# Altium PCB Board Sensor2.PcbDoc
Units mil, origin at the board's own origin, x right, y up, seen from the top; angles counter-clockwise.
Board outline 12874.02 x 9094.49 mil, 2 copper layers (Top Layer, Bottom Layer); 33 components, 0 nets, 158 pads, 0 vias.
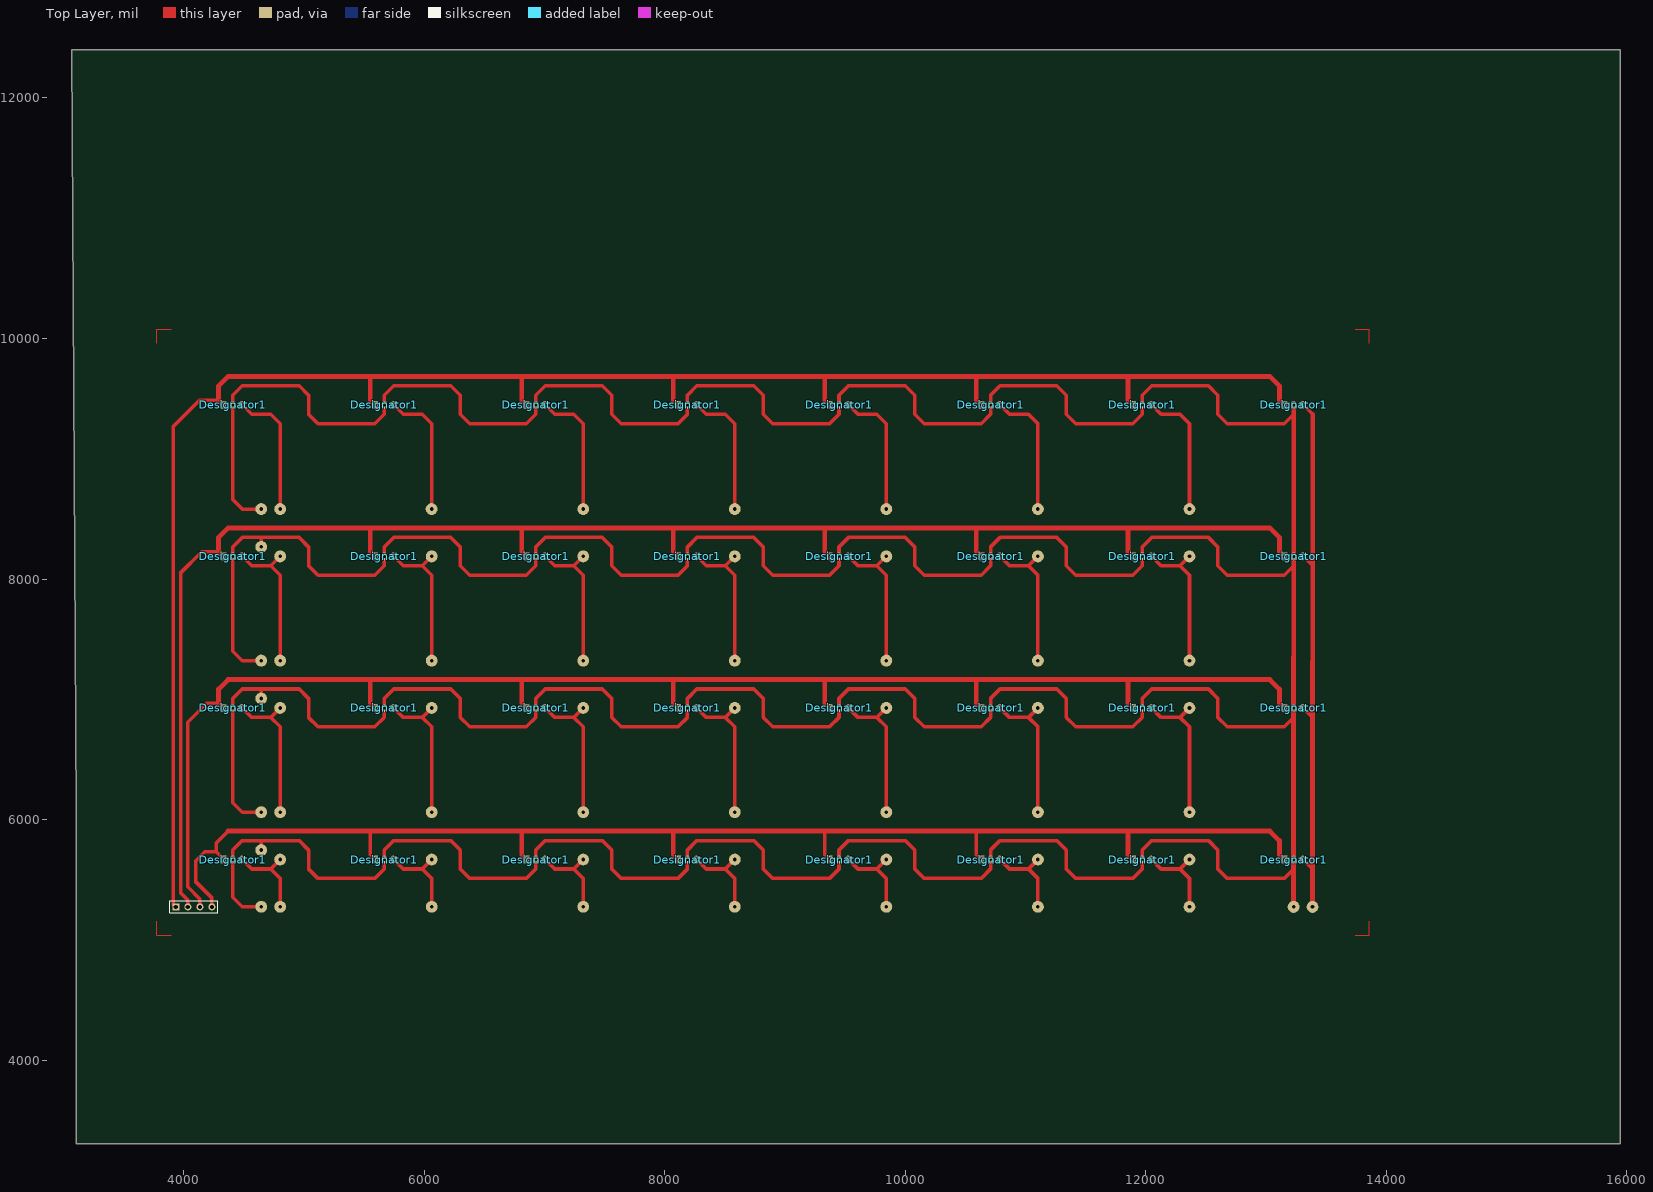
[diagram p0: Top Layer view]
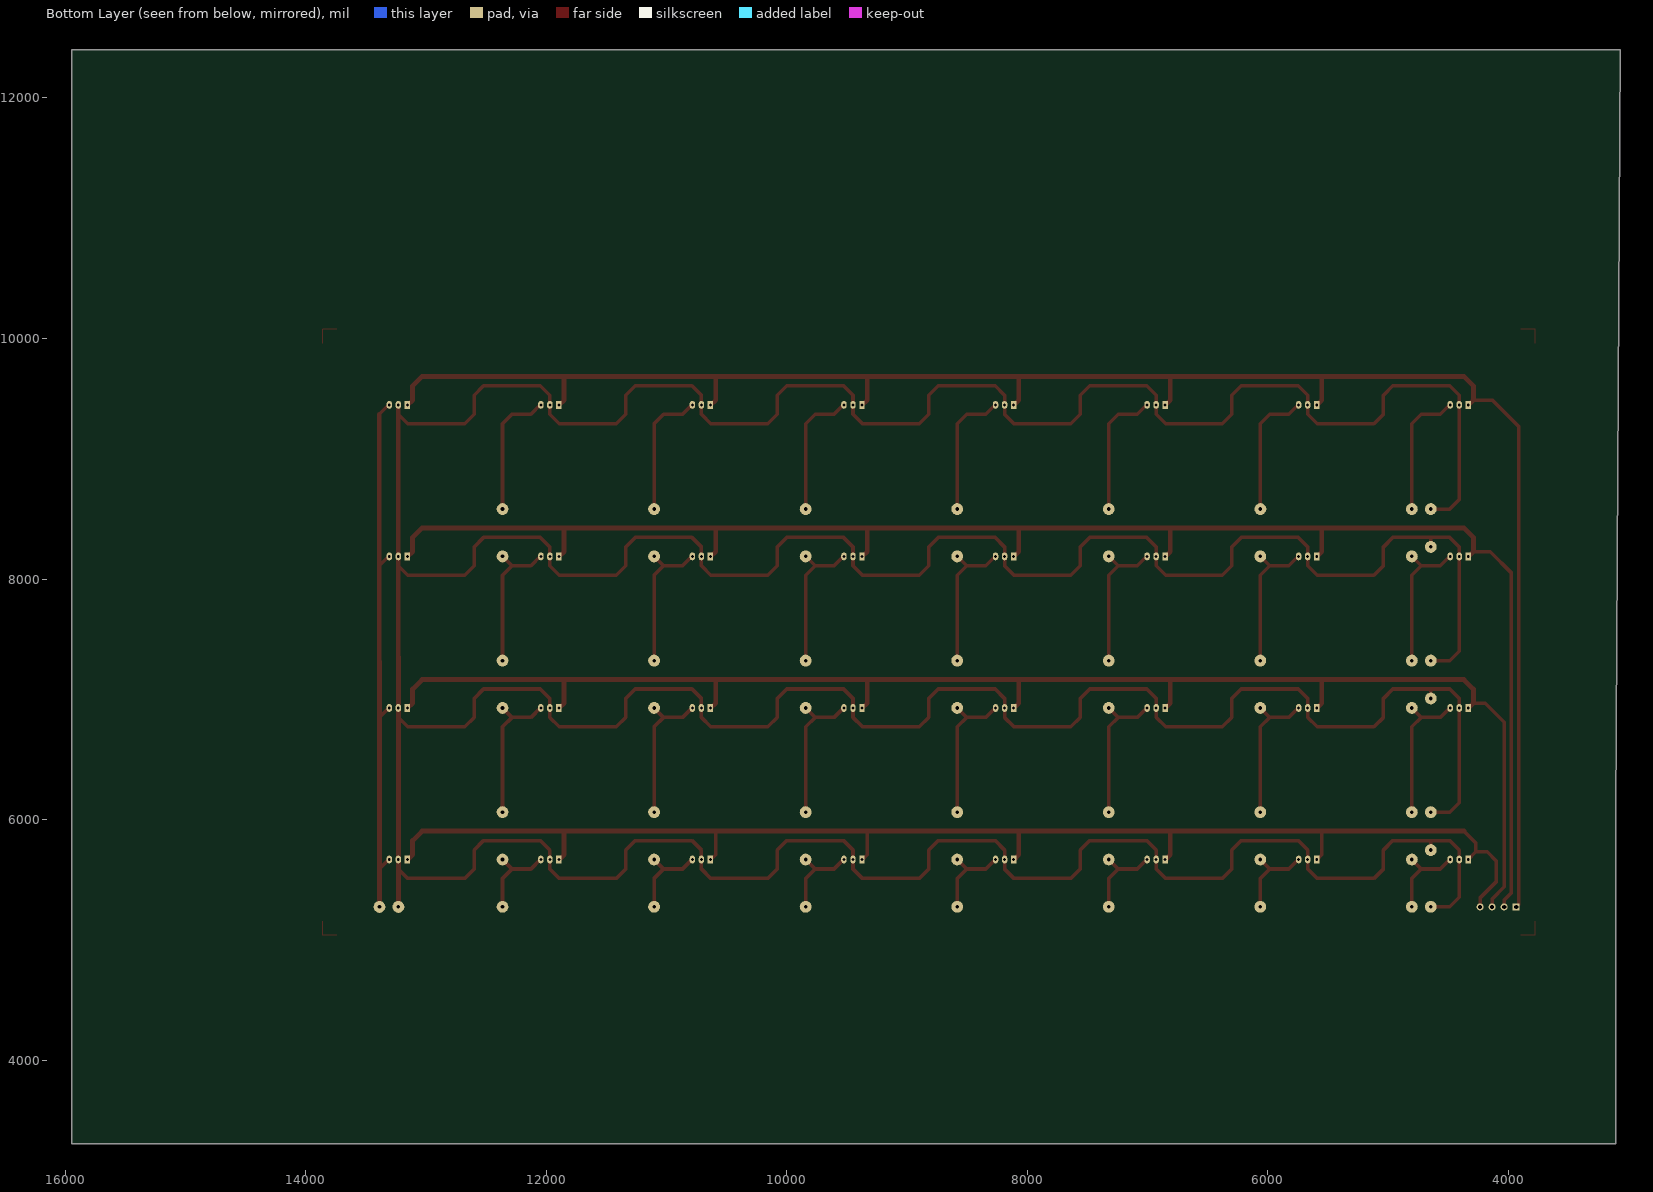
[diagram p1: Bottom Layer view, seen from below]

## Layer stack, top to bottom
Top Layer: signal copper 1.4
Dielectric: dielectric 12.6, FR-4, Dk 4.8
Bottom Layer: signal copper 1.4

## Board outline
3070.87,12401.57 15944.88,12401.57 15944.88,3307.09 3110.24,3307.09 3110.24,6062.99

## Design rules (kind name [scope] priority, off if disabled: settings)
Clearance [All] p1: gap=10
ComponentClearance [All] p1: gap=10 collisioncheckmode=0
PolygonConnect [All] p1: connectstyle=Relief reliefconductorwidth=10 reliefentries=4 polygonreliefangle="90 Angle"
RoutingLayers [All] p1: top layer=Horizontal bottom layer=Vertical
RoutingVias [All] p1: holewidth=28 width=50 viastyle="Through Hole" minholewidth=28 minwidth=50 maxholewidth=28 maxwidth=50
SolderMaskExpansion [All] p1: expansion=4
TestPointUsage [All] p1: valid=0 allowmultiple=FALSE
Testpoint [All] p1: side=15 testpointundercomponent=TRUE minsize=40 maxsize=100 preferedsize=60 minholesize=0 maxholesize=40 preferedholesize=32 testpointgrid=1 style=1023 order=-539222988
Width [All] p1: maxlimit=984.25 minlimit=9.84 preferedwidth=10 toplayer_prefwidth=39.37 bottomlayer_minwidth=10 bottomlayer_maxwidth=10 minimp=50.000000 maximp=50.000000 favimp=50.000000
16 further rules are at their usual default settings.

## Components (designator, comment, footprint, x,y, rotation, side; value= is the part's Value field where it differs from the comment)
Designator1 "Comment" "PCBComponent_1 - duplicate" 13229.25,9448.82 r0 top
Designator1 "Comment" "PCBComponent_1 - duplicate" 11969.41,9448.82 r0 top
Designator1 "Comment" "PCBComponent_1 - duplicate" 13229.25,8188.98 r0 top
Designator1 "Comment" "PCBComponent_1 - duplicate" 11969.41,8188.98 r0 top
Designator1 "Comment" "PCBComponent_1 - duplicate" 13229.25,5669.29 r0 top
Designator1 "Comment" "PCBComponent_1 - duplicate" 11969.41,5669.29 r0 top
Designator1 "Comment" "PCBComponent_1 - duplicate" 10709.57,5669.29 r0 top
Designator1 "Comment" "PCBComponent_1 - duplicate" 9449.72,5669.29 r0 top
Designator1 "Comment" "PCBComponent_1 - duplicate" 8189.88,5669.29 r0 top
Designator1 "Comment" "PCBComponent_1 - duplicate" 6930.04,5669.29 r0 top
Designator1 "Comment" "PCBComponent_1 - duplicate" 5670.2,5669.29 r0 top
Designator1 "Comment" "PCBComponent_1 - duplicate" 4410.35,5669.29 r0 top
Designator1 "Comment" "PCBComponent_1 - duplicate" 10709.57,9448.82 r0 top
Designator1 "Comment" "PCBComponent_1 - duplicate" 9449.72,9448.82 r0 top
Designator1 "Comment" "PCBComponent_1 - duplicate" 8189.88,9448.82 r0 top
Designator1 "Comment" "PCBComponent_1 - duplicate" 6930.04,9448.82 r0 top
Designator1 "Comment" "PCBComponent_1 - duplicate" 5670.2,9448.82 r0 top
Designator1 "Comment" "PCBComponent_1 - duplicate" 4410.35,9448.82 r0 top
Designator1 "Comment" "PCBComponent_1 - duplicate" 4410.35,8188.98 r0 top
Designator1 "Comment" "PCBComponent_1 - duplicate" 5670.2,8188.98 r0 top
Designator1 "Comment" "PCBComponent_1 - duplicate" 6930.04,8188.98 r0 top
Designator1 "Comment" "PCBComponent_1 - duplicate" 8189.88,8188.98 r0 top
Designator1 "Comment" "PCBComponent_1 - duplicate" 9449.72,8188.98 r0 top
Designator1 "Comment" "PCBComponent_1 - duplicate" 10709.57,8188.98 r0 top
Designator1 "Comment" "PCBComponent_1 - duplicate" 13229.25,6929.13 r0 top
Designator1 "Comment" "PCBComponent_1 - duplicate" 11969.41,6929.13 r0 top
Designator1 "Comment" "PCBComponent_1 - duplicate" 10709.57,6929.13 r0 top
Designator1 "Comment" "PCBComponent_1 - duplicate" 9449.72,6929.13 r0 top
Designator1 "Comment" "PCBComponent_1 - duplicate" 8189.88,6929.13 r0 top
Designator1 "Comment" "PCBComponent_1 - duplicate" 6930.04,6929.13 r0 top
Designator1 "Comment" "PCBComponent_1 - duplicate" 5670.2,6929.13 r0 top
Designator1 "Comment" "PCBComponent_1 - duplicate" 4410.35,6929.13 r0 top
? "" HDR1X4 3937.01,5275.59 r0 top

## Footprints (in the part's own frame and the unit in brackets; to place one, negate y for a bottom-side part, rotate by r counter-clockwise, add the part's x,y. Pads: shape width x height; smd on the part's side, far side on the other; paste and mask are expansions set on the pad)
HDR1X4 [mm]
  rect 1.5x1.5 hole 0.9: 1(0,0)
  round 1.5 hole 0.9: 2(2.54,0) 3(5.08,0) 4(7.62,0)
  silkscreen extent -1.27,-1.27 8.89,1.27
"PCBComponent_1 - duplicate" [mm]
  rect 1.15x1.65 hole 0.6: 1(-1.905,0)
  oval 1.15x1.65 hole 0.6: 2(0,0) 3(1.905,0)

## Free pads (board coordinates)
  round 98.43 hole 30: 3(13228.35,5275.59) 4(13385.83,5275.59) 9(4646.57,5276.5) 9(4646.57,5748.03) 9(4646.57,6062.99) 9(4646.57,7007.87) 9(4646.57,7322.83) 9(4646.57,8267.72) 9(4646.57,8582.68) 9(4804.06,5669.29) 9(4804.06,6929.13) 9(6063.9,5669.29) 9(6063.9,6929.13) 9(6063.9,8188.98) 9(7323.74,5669.29) 9(7323.74,6929.13) 9(7323.74,8188.98) 9(8583.58,5669.29) 9(8583.58,6929.13) 9(8583.58,8188.98) 9(9843.43,5669.29) 9(9843.43,6929.13) 9(9843.43,8188.98) 9(11103.27,5669.29) 9(11103.27,6929.13) 9(11103.27,8188.98) 9(12363.11,5669.29) 9(12363.11,6929.13) 9(12363.11,8188.98) 10(4804.06,5276.5) 10(4804.06,6062.99) 10(4804.06,8582.68) 10(6062.99,8582.68) 10(6063.9,5276.5) 10(6063.9,6062.99) 10(6063.9,7322.83) 10(7323.74,5276.5) 10(7323.74,6062.99) 10(7323.74,7322.83) 10(7323.74,8582.68) 10(8583.58,5276.5) 10(8583.58,6062.99) 10(8583.58,7322.83) 10(8583.58,8582.68) 10(9843.43,5276.5) 10(9843.43,6062.99) 10(9843.43,7322.83) 10(9843.43,8582.68) 10(11103.27,5276.5) 10(11103.27,6062.99) 10(11103.27,7322.83) 10(11103.27,8582.68) 10(12363.11,5276.5) 10(12363.11,6062.99) 10(12363.11,7322.83) 10(12363.11,8582.68) 11(4804.06,8188.98) 12(4804.06,7322.83)

## Nets (pads, with @x,y where several pads share a name; then routed paths per layer and width w, separated by ;. In a path a pad name is that pad's centre, name@x,y a point inside that pad or via, vN(x,y) a via of type N, cw(c..) or ccw(c..) an arc to the next point about the centre after c; other vN are vias at no path point)
pads on no net: ?.1 ?.2 ?.3 ?.4 Designator1.1 Designator1.2 Designator1.3
copper on no net: | length 143754.7
  Top Layer w10: 3779.53,5157.48 3779.53,5039.37 3897.64,5039.37 ; 3780.43,9960.63 3780.43,10078.74 3898.54,10078.74 ; 4266.46,5732.99 4271.65,5732.99 ; 4370.08,5905.51 4370.98,5905.51 ; 13740.16,5039.37 13858.27,5039.37 13858.27,5157.48 ; 13741.06,10078.74 13859.17,10078.74 13859.17,9960.63
  Top Layer w29.53: 3937.01,5275.59 3917.32,5295.28 3917.32,9271.65 4133.86,9488.19 4292.24,9488.19 ; 4037.01,5275.59 4037.01,5333.07 3976.38,5393.7 3976.38,8051.18 4153.54,8228.35 4292.24,8228.35 ; 4104.33,5482.28 4237.01,5349.61 4237.01,5275.59 ; 4104.33,5492.13 4104.33,5659.45 4177.87,5732.99 4271.65,5732.99 ; 4137.01,5275.59 4137.01,5341.34 4035.43,5442.91 4035.43,6811.02 4192.91,6968.5 4292.24,6968.5 ; 4335.35,5669.29 4271.65,5732.99 ; 4370.08,5905.51 4271.65,5807.09 4271.65,5732.99 ; 4410.35,7401.57 4410.35,8188.98 4410.35,8267.72 4489.1,8346.46 4961.54,8346.46 5040.28,8267.72 5040.28,8110.24 5119.02,8031.5 5591.46,8031.5 5670.2,8110.24 5670.2,8188.98 5670.2,8267.72 5748.94,8346.46 6221.38,8346.46 6300.12,8267.72 6300.12,8110.24 6378.86,8031.5 6851.3,8031.5 6930.04,8110.24 6930.04,8188.98 6930.04,8267.72 7008.78,8346.46 7481.22,8346.46 7559.96,8267.72 7559.96,8110.24 7638.7,8031.5 8111.14,8031.5 8189.88,8110.24 8189.88,8267.72 8268.62,8346.46 8741.06,8346.46 8819.8,8267.72 8819.8,8110.24 8898.54,8031.5 9370.98,8031.5 9449.72,8110.24 9449.72,8267.72 9528.47,8346.46 10000.91,8346.46 10079.65,8267.72 ; 4410.35,7401.58 4489.09,7322.83 4646.57,7322.83 ; 4489.09,5669.29 4567.84,5590.55 4725.32,5590.55 ; 4489.09,6929.13 4567.84,6850.39 4725.32,6850.39 ; 4489.09,8188.98 4567.84,8110.24 4725.32,8110.24 ; 4489.09,9448.82 4567.84,9370.08 4725.32,9370.08 4804.06,9291.34 4804.06,8582.68 ; 4646.57,5276.5 4489.09,5276.5 4410.35,5355.24 4410.35,5669.29 4410.35,5748.03 4489.1,5826.77 4961.54,5826.77 5040.28,5748.03 5040.28,5590.55 5119.02,5511.81 5591.46,5511.81 5670.2,5590.55 5670.2,5669.29 5670.2,5748.03 5748.94,5826.77 6221.38,5826.77 6300.12,5748.03 6300.12,5590.55 6378.86,5511.81 6851.3,5511.81 6930.04,5590.55 6930.04,5669.29 6930.04,5748.03 7008.78,5826.77 7481.22,5826.77 7559.96,5748.03 7559.96,5590.55 7638.7,5511.81 8111.14,5511.81 8189.88,5590.55 8189.88,5748.03 8268.62,5826.77 8741.06,5826.77 8819.8,5748.03 8819.8,5590.55 8898.54,5511.81 9370.98,5511.81 9449.72,5590.55 9449.72,5748.03 9528.47,5826.77 10000.91,5826.77 10079.65,5748.03 10079.65,5708.66 10079.65,5590.55 10158.39,5511.81 10630.83,5511.81 10709.57,5590.55 10709.57,5669.29 10709.57,5748.03 10788.31,5826.77 11260.75,5826.77 11339.49,5748.03 11339.49,5590.55 11418.23,5511.81 11890.67,5511.81 11969.41,5590.55 11969.41,5748.03 12048.15,5826.77 12520.59,5826.77 12599.33,5748.03 12599.33,5590.55 12678.07,5511.81 13150.51,5511.81 13229.25,5590.55 ; 4646.57,5748.03 4646.57,5826.77 ; 4646.57,6062.99 4489.09,6062.99 4410.35,6141.73 4410.35,6929.13 4410.35,7007.87 4489.1,7086.61 4961.54,7086.61 5040.28,7007.87 5040.28,6850.39 5119.02,6771.65 5591.46,6771.65 5670.2,6850.39 5670.2,6929.13 5670.2,7007.87 5748.94,7086.61 6221.38,7086.61 6300.12,7007.87 6300.12,6850.39 6378.86,6771.65 6851.3,6771.65 6930.04,6850.39 6930.04,6929.13 6930.04,7007.87 7008.78,7086.61 7481.22,7086.61 7559.96,7007.87 7559.96,6850.39 7638.7,6771.65 8111.14,6771.65 8189.88,6850.39 8189.88,7007.87 8268.62,7086.61 8741.06,7086.61 8819.8,7007.87 8819.8,6850.39 8898.54,6771.65 9370.98,6771.65 9449.72,6850.39 9449.72,7007.87 9528.47,7086.61 10000.91,7086.61 10079.65,7007.87 10079.65,6850.39 10158.39,6771.65 10630.83,6771.65 10709.57,6850.39 10709.57,6929.13 10709.57,7007.87 10788.31,7086.61 11260.75,7086.61 11339.49,7007.87 11339.49,6850.39 11418.23,6771.65 11890.67,6771.65 11969.41,6850.39 11969.41,7007.87 12048.15,7086.61 12520.59,7086.61 12599.33,7007.87 12599.33,6850.39 12678.07,6771.65 13150.51,6771.65 13229.25,6850.39 ; 4646.57,7007.87 4646.57,7086.61 ; 4646.57,8267.72 4646.57,8346.46 ; 4646.57,8582.68 4489.09,8582.68 4410.35,8661.42 4410.35,9448.82 4410.35,9527.56 4489.1,9606.3 4961.54,9606.3 5040.28,9527.56 5040.28,9370.08 5119.02,9291.34 5591.46,9291.34 5670.2,9370.08 5670.2,9448.82 5670.2,9527.56 5748.94,9606.3 6221.38,9606.3 6300.12,9527.56 6300.12,9370.08 6378.86,9291.34 6851.3,9291.34 6930.04,9370.08 6930.04,9448.82 6930.04,9527.56 7008.78,9606.3 7481.22,9606.3 7559.96,9527.56 7559.96,9370.08 7638.7,9291.34 8111.14,9291.34 8189.88,9370.08 8189.88,9527.56 8268.62,9606.3 8741.06,9606.3 8819.8,9527.56 8819.8,9370.08 8898.54,9291.34 9370.98,9291.34 9449.72,9370.08 9449.72,9527.56 9528.47,9606.3 10000.91,9606.3 10079.65,9527.56 ; 4804.06,5286.34 4804.06,5511.81 4725.32,5590.55 ; 4804.06,5669.29 4725.32,5590.55 ; 4804.06,6062.99 4804.06,6771.65 4725.32,6850.39 ; 4804.06,6929.13 4725.32,6850.39 ; 4804.06,7322.83 4804.06,7952.76 4804.06,8031.5 4725.32,8110.24 ; 4804.06,8188.98 4725.32,8110.24 ; 5552.09,5903.5 5552.09,5708.66 5591.46,5669.29 ; 5748.94,5669.29 5827.68,5590.55 5985.16,5590.55 ; 5748.94,6929.13 5827.68,6850.39 5985.16,6850.39 ; 5748.94,8188.98 5827.68,8110.24 5985.16,8110.24 ; 5748.94,9448.82 5827.68,9370.08 5985.16,9370.08 6063.9,9291.34 6063.9,8582.68 ; 6063.9,5276.5 6063.9,5511.81 5985.16,5590.55 ; 6063.9,5669.29 5985.16,5590.55 ; 6063.9,6062.99 6063.9,6771.65 5985.16,6850.39 ; 6063.9,6929.13 5985.16,6850.39 ; 6063.9,7322.83 6063.9,8031.5 5985.16,8110.24 ; 6063.9,8188.98 5985.16,8110.24 ; 7008.78,5669.29 7087.52,5590.55 7245,5590.55 ; 7008.78,6929.13 7087.52,6850.39 7245,6850.39 ; 7008.78,8188.98 7087.52,8110.24 7245,8110.24 ; 7008.78,9448.82 7087.52,9370.08 7245,9370.08 7323.74,9291.34 7323.74,8582.68 ; 7323.74,5276.5 7323.74,5511.81 7245,5590.55 ; 7323.74,5669.29 7245,5590.55 ; 7323.74,6062.99 7323.74,6771.65 7245,6850.39 ; 7323.74,6929.13 7245,6850.39 ; 7323.74,7322.83 7323.74,8031.5 7245,8110.24 ; 7323.74,8188.98 7245,8110.24 ; 8268.62,5669.29 8347.36,5590.55 8504.84,5590.55 ; 8268.62,6929.13 8347.36,6850.39 8504.84,6850.39 ; 8268.62,8188.98 8347.36,8110.24 8504.84,8110.24 ; 8268.62,9448.82 8347.36,9370.08 8504.84,9370.08 8583.58,9291.34 8583.58,8582.68 ; 8583.58,5276.5 8583.58,5511.81 8504.84,5590.55 ; 8583.58,5669.29 8504.84,5590.55 ; 8583.58,6062.99 8583.58,6771.65 8504.84,6850.39 ; 8583.58,6929.13 8504.84,6850.39 ; 8583.58,7322.83 8583.58,8031.5 8504.84,8110.24 ; 8583.58,8188.98 8504.84,8110.24 ; 9331.61,5903.5 9331.61,5708.66 9370.98,5669.29 ; 9528.47,5669.29 9607.21,5590.55 9764.69,5590.55 ; 9528.47,6929.13 9607.21,6850.39 9764.69,6850.39 ; 9528.47,8188.98 9607.21,8110.24 9764.69,8110.24 ; 9528.47,9448.82 9607.21,9370.08 9764.69,9370.08 9843.43,9291.34 9843.43,8582.68 ; 9843.43,5276.5 9843.43,5511.81 9764.69,5590.55 ; 9843.43,5669.29 9764.69,5590.55 ; 9843.43,6062.99 9843.43,6771.65 9764.69,6850.39 ; 9843.43,6929.13 9764.69,6850.39 ; 9843.43,7322.83 9843.43,8031.5 9764.69,8110.24 ; 9843.43,8188.98 9764.69,8110.24 ; 10078.74,8267.72 10078.74,8110.24 10158.39,8031.5 10630.83,8031.5 10709.57,8110.24 10709.57,8188.98 10709.57,8267.72 10788.31,8346.46 11260.75,8346.46 11339.49,8267.72 11339.49,8110.24 11418.23,8031.5 11890.67,8031.5 11969.41,8110.24 11969.41,8267.72 12048.15,8346.46 12520.59,8346.46 12599.33,8267.72 12599.33,8110.24 12678.07,8031.5 13150.51,8031.5 13229.25,8110.24 ; 10078.74,9370.08 10078.74,9527.56 ; 10079.65,9370.08 10158.39,9291.34 10630.83,9291.34 10709.57,9370.08 10709.57,9448.82 10709.57,9527.56 10788.31,9606.3 11260.75,9606.3 ; 10591.46,5905.51 10591.46,5708.66 10630.83,5669.29 ; 10788.31,5669.29 10867.05,5590.55 11024.53,5590.55 ; 10788.31,6929.13 10867.05,6850.39 11024.53,6850.39 ; 10788.31,8188.98 10867.05,8110.24 11024.53,8110.24 ; 10788.31,9448.82 10867.05,9370.08 11024.53,9370.08 11103.27,9291.34 11103.27,8582.68 ; 11103.27,5276.5 11103.27,5511.81 11024.53,5590.55 ; 11103.27,5669.29 11024.53,5590.55 ; 11103.27,6062.99 11103.27,6771.65 11024.53,6850.39 ; 11103.27,6929.13 11024.53,6850.39 ; 11103.27,7322.83 11103.27,8031.5 11024.53,8110.24 ; 11103.27,8188.98 11024.53,8110.24 ; 11259.84,9606.3 11338.58,9527.56 11338.58,9370.08 ; 11339.49,9370.08 11418.23,9291.34 11890.67,9291.34 11969.41,9370.08 11969.41,9527.56 12048.15,9606.3 12520.59,9606.3 12599.33,9527.56 12599.33,9370.08 12678.07,9291.34 13150.51,9291.34 13229.25,9370.08 ; 12048.15,5669.29 12126.89,5590.55 12284.37,5590.55 ; 12048.15,6929.13 12126.89,6850.39 12284.37,6850.39 ; 12048.15,8188.98 12126.89,8110.24 12284.37,8110.24 ; 12048.15,9448.82 12126.89,9370.08 12284.37,9370.08 12363.11,9291.34 12363.11,8582.68 ; 12363.11,5276.5 12363.11,5511.81 12284.37,5590.55 ; 12363.11,5669.29 12284.37,5590.55 ; 12363.11,6062.99 12363.11,6771.65 12284.37,6850.39 ; 12363.11,6929.13 12284.37,6850.39 ; 12363.11,7322.83 12363.11,8031.5 12284.37,8110.24 ; 12363.11,8188.98 12284.37,8110.24 ; 13307.99,5669.29 13386.73,5590.55 ; 13307.99,6929.13 13386.73,6850.39 ; 13307.99,8188.98 13386.73,8110.24 ; 13307.99,9448.82 13386.73,9370.08
  Top Layer w39.37: 4331.61,6929.13 4292.24,6968.5 4292.24,7086.61 4370.98,7165.35 13032.4,7165.35 13111.14,7086.61 13111.14,6968.5 13150.51,6929.13 ; 4331.61,8188.98 4292.24,8228.35 4292.24,8346.46 4370.98,8425.2 13032.4,8425.2 13111.14,8346.46 13111.14,8228.35 13150.51,8188.98 ; 4331.61,9448.82 4292.24,9488.19 4292.24,9606.3 4370.98,9685.04 13032.4,9685.04 13111.14,9606.3 13111.14,9488.19 13150.51,9448.82 ; 4370.98,5905.51 13032.4,5905.51 13111.14,5826.77 13111.14,5708.66 13150.51,5669.29 ; 5552.09,7163.34 5552.09,6968.5 5591.46,6929.13 ; 5552.09,8423.18 5552.09,8228.35 5591.46,8188.98 ; 5552.09,9683.02 5552.09,9488.19 5591.46,9448.82 ; 6811.93,5905.51 6811.93,5708.66 6851.3,5669.29 ; 6811.93,7165.35 6811.93,6968.5 6851.3,6929.13 ; 6811.93,8425.2 6811.93,8228.35 6851.3,8188.98 ; 6811.93,9685.04 6811.93,9488.19 6851.3,9448.82 ; 8071.77,5903.5 8071.77,5708.66 8111.14,5669.29 ; 8071.77,7163.34 8071.77,6968.5 8111.14,6929.13 ; 8071.77,8423.18 8071.77,8228.35 8111.14,8188.98 ; 8071.77,9683.02 8071.77,9488.19 8111.14,9448.82 ; 9331.61,7163.34 9331.61,6968.5 9370.98,6929.13 ; 9331.61,8423.18 9331.61,8228.35 9370.98,8188.98 ; 9331.61,9683.02 9331.61,9488.19 9370.98,9448.82 ; 10591.46,7165.35 10591.46,6968.5 10630.83,6929.13 ; 10591.46,8425.2 10591.46,8228.35 10630.83,8188.98 ; 10591.46,9685.04 10591.46,9488.19 10630.83,9448.82 ; 11851.3,5905.51 11851.3,5708.66 11890.67,5669.29 ; 11851.3,7165.35 11851.3,6968.5 11890.67,6929.13 ; 11851.3,8425.2 11851.3,8228.35 11890.67,8188.98 ; 11851.3,9685.04 11851.3,9488.19 11890.67,9448.82 ; 13228.35,5275.59 13229.25,9448.82 ; 13385.83,5275.59 13386.73,9370.08